# Altium PCB AX301_AX4010.PcbDoc (part 3 of 10)
Units mil, origin at the board's own origin, x right, y up, seen from the top; angles counter-clockwise.
Board outline 5185 x 3614 mil, 4 copper layers (Top Layer, GND, Mid-Layer 1, Bottom Layer); 191 components, 338 nets, 1108 pads, 420 vias.
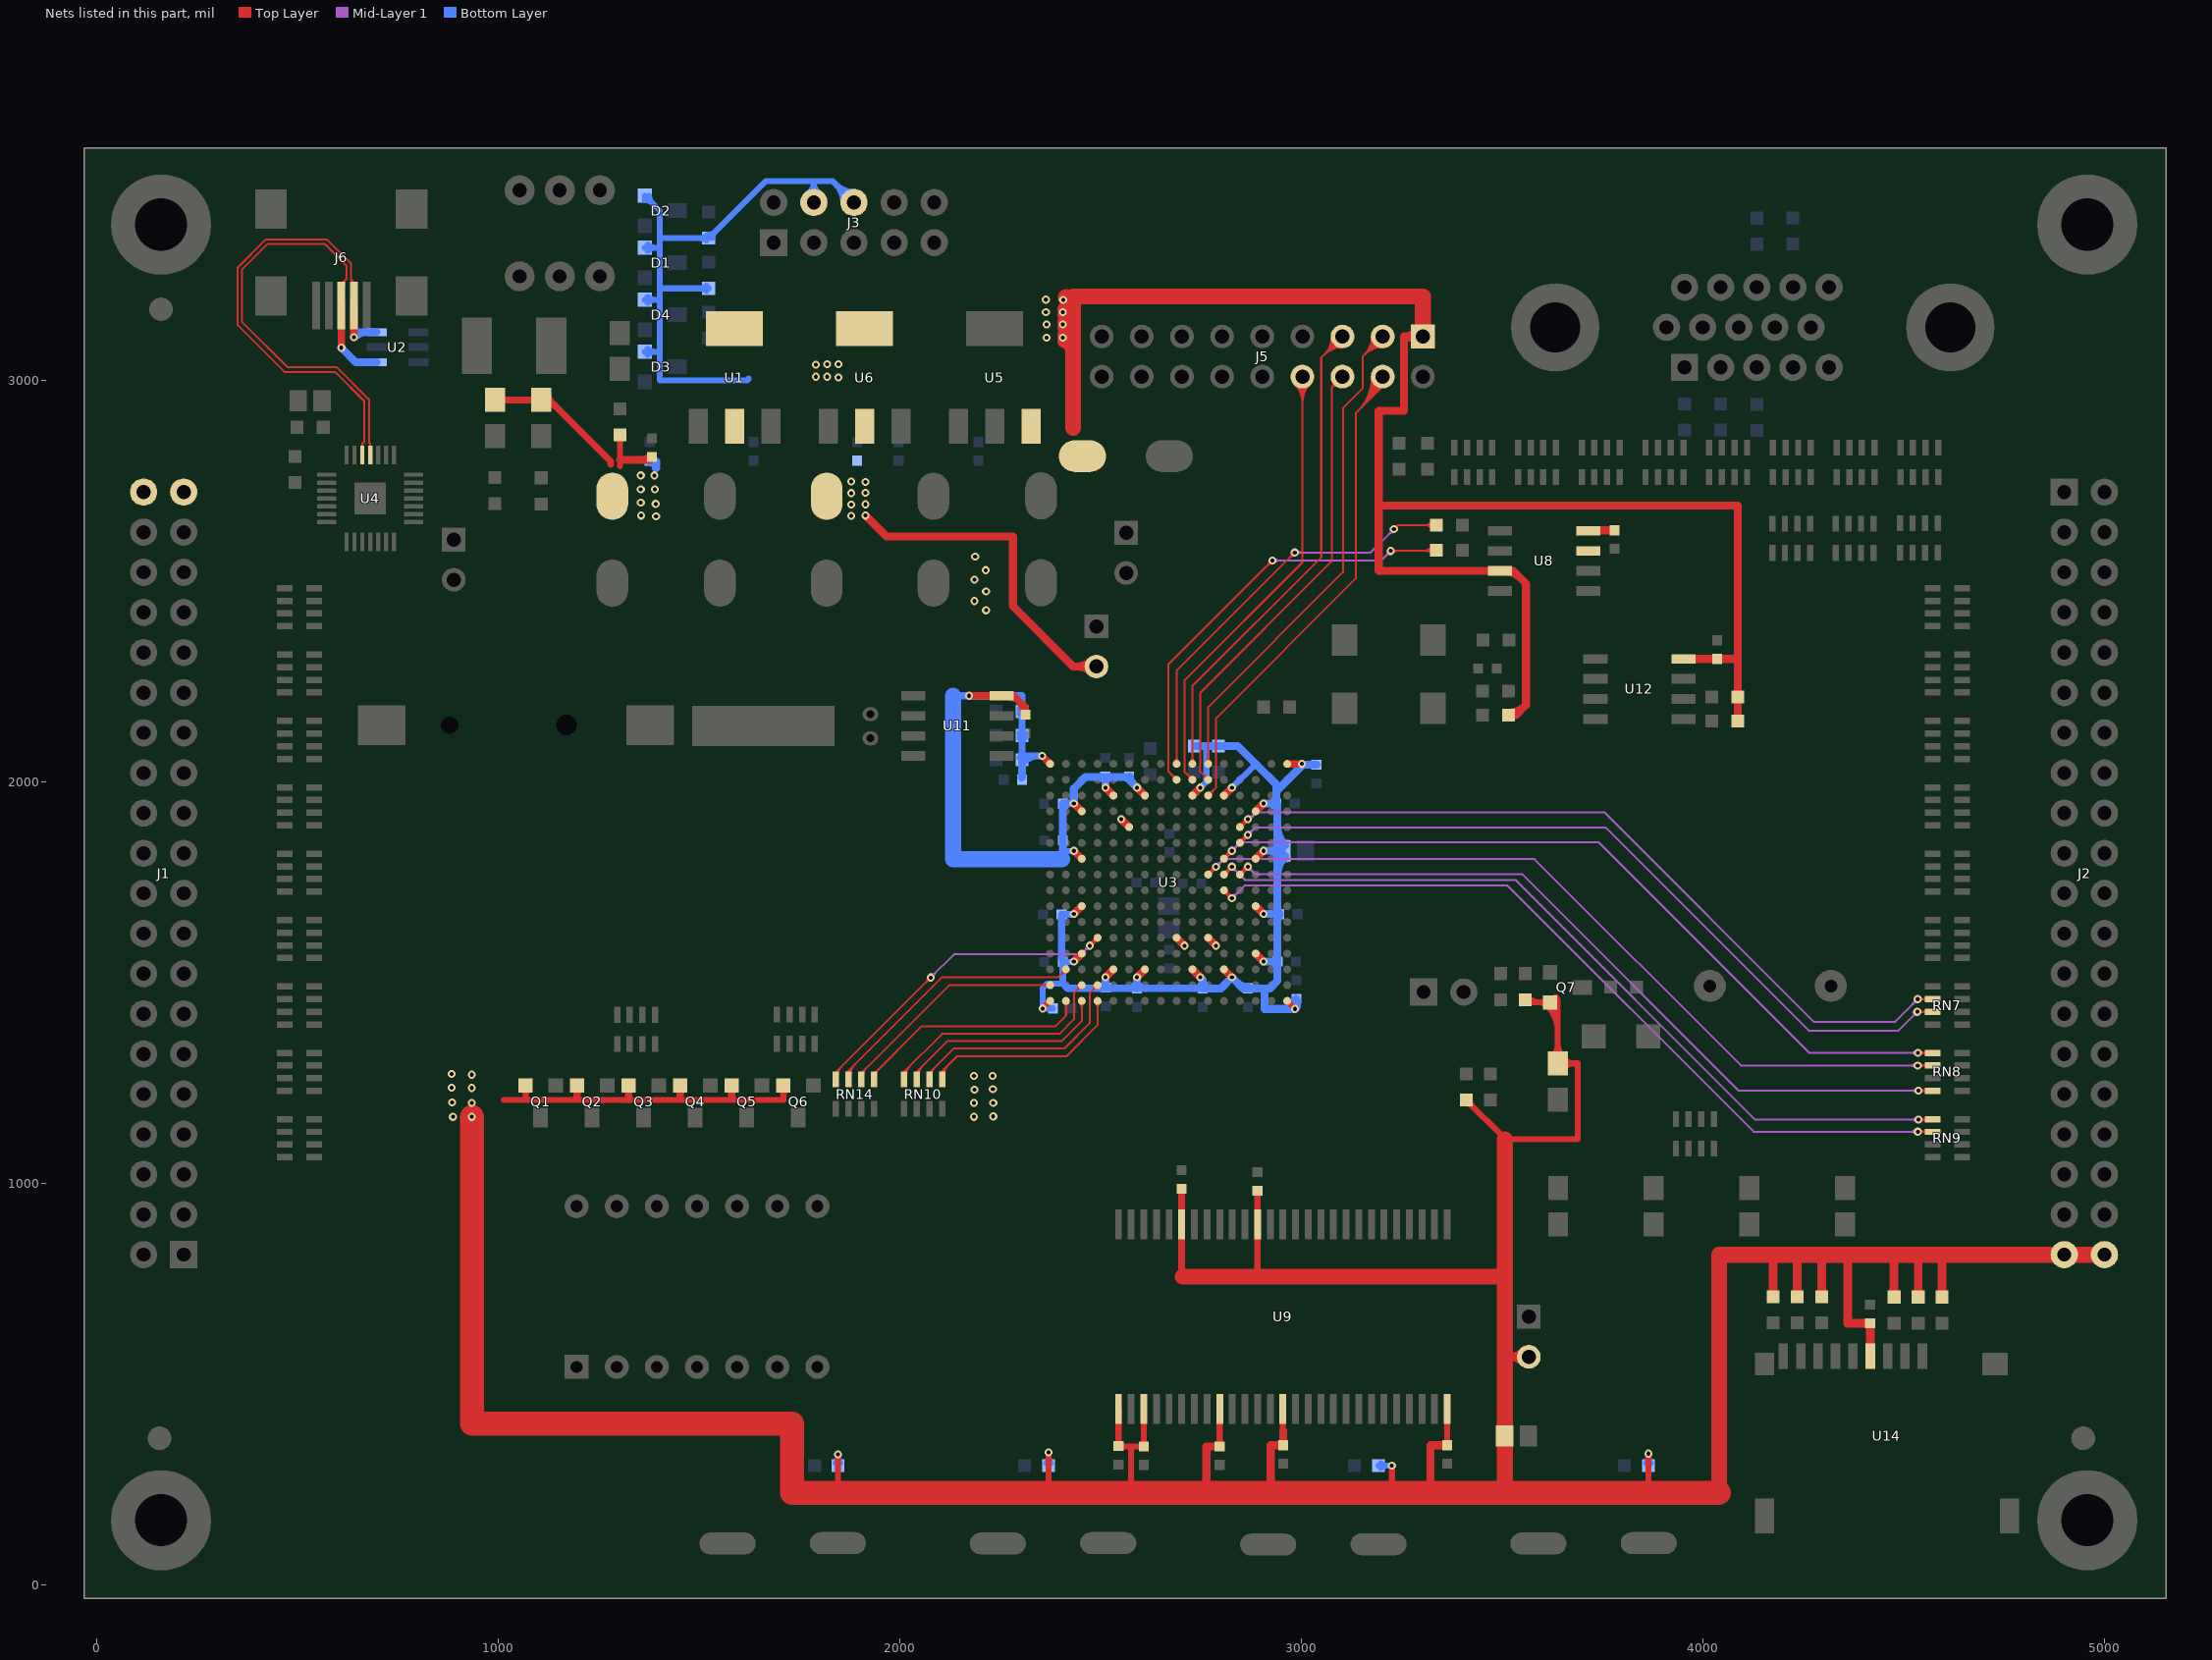
[diagram p5: the nets of this part, all layers, seen from the top]

## Via types
v1: diameter 20, hole 10, Top Layer to Bottom Layer, 377 vias
v2: diameter 30, hole 15, Top Layer to Bottom Layer, 41 vias
v3: diameter 40, hole 20, Top Layer to Bottom Layer, 2 vias

## Nets (pads, with @x,y where several pads share a name; then routed paths per layer and width w, separated by ;. In a path a pad name is that pad's centre, name@x,y a point inside that pad or via, vN(x,y) a via of type N, cw(c..) or ccw(c..) an arc to the next point about the centre after c; other vN are vias at no path point) (continued)
D2V5: C4.1 D1.2 D2.2 D3.2 D4.2 EC1.1 J3.4 J3.6 P3.2 R8.1 R15.1 U3.F12 U3.H12 U3.L5 U6.2 U6.4 | length 2947.9
  Top Layer w19.68: v1(2551.89,1906.48) U3.L5@2571.57,1886.8 ; U3.H12@2689.68,1611.2 v1(2709.37,1591.52) ; U3.F12@2768.43,1611.2 v1(2788.11,1591.52)
  Top Layer w20: v1(1915,2663) 1967,2611 2282,2611 2282,2437 2432,2287 P3.2@2490,2287 ; P3.2@2476.19,2273.19 ccw(c2442.86,2239.86) 2442.86,2287 ccw(c2442.86,2334.14) P3.2@2476.19,2300.81
  Bottom Layer w15: D3.2@1365,3071 1400,3071 ; D4.2@1365,3200.67 1400.67,3200.67 ; D1.2@1365,3330.33 1401.33,3330.33 ; D2.2@1365,3449.5 cw(c1365,3424.15) 1382.92,3442.08 cw(c1400.85,3460) D2.2@1375.5,3460 ; D2.2@1365,3460 1402,3423 1402,3227 ; D3.2@1372.42,3063.58 cw(c1390.35,3045.65) 1390.35,3071 cw(c1390.35,3096.35) D3.2@1372.42,3078.42 ; D4.2@1372.42,3193.24 cw(c1390.35,3175.32) 1390.35,3200.67 cw(c1390.35,3226.02) D4.2@1372.42,3208.09 ; D1.2@1372.42,3322.91 cw(c1390.35,3304.98) 1390.35,3330.33 cw(c1390.35,3355.68) D1.2@1372.42,3337.76 ; 1407,3354 R8.1@1524,3354 1666,3496 1833,3496 J3.6@1886,3443 ; R15.1@1517.99,3222.99 ccw(c1503.48,3208.48) 1503.48,3229 ccw(c1503.48,3249.52) R15.1@1517.99,3235.01 ; R8.1@1517.99,3347.99 ccw(c1503.48,3333.48) 1503.48,3354 ccw(c1503.48,3374.52) R8.1@1517.99,3360.01 ; R15.1@1524,3229 1404,3229 1402,3227 ; R8.1@1524,3362.5 ccw(c1524,3383.02) 1538.51,3368.51 ccw(c1553.02,3354) R8.1@1532.5,3354 ; 1624,3004 1620,3000 1402,3000 1402,3227 ; J3.4@1771.49,3465.18 ccw(c1753.95,3492) 1786,3492 ; J3.4@1786,3443 1786,3492 ; J3.4@1800.51,3465.18 cw(c1818.05,3492) 1786,3492 ; J3.6@1859.5,3443 ccw(c1795.52,3443) 1840.76,3488.24 ccw(c1886,3533.48) J3.6@1886,3469.5
  other v1: 1879,2662 1879,2690 1915,2691 1879,2719 1915,2720 1915,2747 1879,2748 1847,3007 1791,3009 1819,3009 1791,3039 1819,3040 1847,3040
D3V3: C10.1 C11.1 C12.1 C13.1 C14.1 C15.1 C16.1 C17.1 C18.1 C19.1 C20.1 C22.1 C23.1 C24.2 C25.1 C26.1 C27.1 C28.1 C29.1 C30.1 C31.1 C32.1 C33.1 C34.1 C35.1 C36.1 C37.1 C43.1 C44.1 C47.1 C49.1 C50.1 EC5.1 EC6.1 J1.39 J1.40 J2.39 J2.40 J5.1 L1.1 LED5.1 LED7.1 LED8.1 P1.2 Q1.2 Q2.2 Q3.2 Q4.2 Q5.2 Q6.2 Q7.2 R1.1 R9.1 R10.1 R11.1 R23.1 R24.1 R25.1 R26.1 R27.1 R32.1 R35.1 R36.1 R37.1 R38.1 R41.1 R42.1 R43.1 R45.1 R47.1 R52.1 U1.2 U1.4 U3.A1 U3.A16 U3.C4 U3.C7 U3.C10 U3.C13 U3.E3 U3.E14 U3.G3 U3.G14 U3.K3 U3.K14 U3.M3 U3.M14 U3.P4 U3.P7 U3.P10 U3.P13 U3.T1 U3.T16 U5.3 U8.3 U8.7 U8.8 U9.1 U9.3 U9.9 U9.14 U9.27 U9.43 U9.49 U11.8 U12.8 U14.4 | length 23612.4
  Top Layer w15: 1013,1207 1068,1207 ; Q1.2@1060.58,1235.58 cw(c1042.65,1217.65) 1068,1217.65 cw(c1093.35,1217.65) Q1.2@1075.42,1235.58 ; Q1.2@1068,1243 1068,1207 ; R1.1@1296.99,2857.99 cw(c1282.48,2843.48) 1303,2843.48 cw(c1323.52,2843.48) R1.1@1309.01,2857.99 ; 1303,2786 1303,2802 R1.1@1303,2864 ; Q6.2@1702.58,1235.58 cw(c1684.65,1217.65) 1710,1217.65 cw(c1735.35,1217.65) Q6.2@1717.42,1235.58 ; Q6.2@1710,1243 1710,1207 1068,1207 ; 1846,228 v1(1846,324) ; v1(2356,1435) U3.T16@2374.72,1453.72 ; 2371,228 v1(2371,329) ; U9.1@2545,437 C30.1@2545,345 2545,344.01 2576.5,344.01 ; C30.1@2548.54,348.54 ccw(c2559.47,359.47) 2559.47,344.01 ; 2576.5,228 2576.5,344.01 ; U9.3@2607.99,437 C29.1@2607.99,344.01 2576.5,344.01 ; C31.1@2797,344 U9.9@2796.97,437 ; 2891,768 C35.1@2891,981 ; 2954.45,378 U9.14@2954.45,437 ; U3.A16@2965.28,1453.72 v1(2985,1434) ; 3226,229 v1(3226,296) ; C33.1@3363.9,347.1 U9.27@3363.9,437 ; R11.1@3411,1198.5 cw(c3411,1177.98) 3425.51,1192.49 cw(c3440.02,1207) R11.1@3419.5,1207 ; R11.1@3411,1207 3507,1111 3507,1109 3689,1109 3689,1298 LED5.1@3639,1298 3639,1450 ; R32.1@3558,1457 3558,1450 Q7.2@3620,1450 3639,1450 ; R32.1@3564.01,1463.01 ccw(c3595.42,1494.42) 3595.42,1450 ; Q7.2@3612.58,1457.42 cw(c3594.65,1475.35) 3594.65,1450 cw(c3594.65,1424.65) 3612.58,1442.58 cw(c3548.78,1378.78) 3639,1378.78 ; Q7.2@3623.18,1453.18 cw(c3584.99,1414.99) 3639,1414.99 ; LED5.1@3626.63,1315.37 ccw(c3596.75,1345.25) 3639,1345.25 ccw(c3681.25,1345.25) LED5.1@3651.37,1315.37 ; Q7.2@3628.89,1444.41 cw(c3639,1438.06) 3639,1450 ; Q7.2@3628.89,1455.59 ccw(c3639,1461.94) 3639,1450 ; Q7.2@3633.79,1463.79 cw(c3621.21,1451.21) 3639,1451.21 ; LED5.1@3651.37,1285.63 cw(c3681.25,1255.75) 3681.25,1298 cw(c3681.25,1340.25) LED5.1@3651.37,1310.37 ; 3865,231 v1(3865,326)
  Top Layer w17: 2702.48,767 U9.49@2702.48,897 C34.1@2702.48,985.52
  Top Layer w17.72: LED7.1@992,2951 LED8.1@1107,2951 1127,2951 1280,2798 1280,2791 ; LED8.1@1107,2949.86 cw(c1107,2898.82) 1143.09,2934.91 ; LED8.1@1123.14,2966 ccw(c1150.04,2966) LED8.1@1131.02,2946.98 ; Q2.2@1189.94,1236.54 cw(c1174.33,1220.93) 1196.4,1220.93 cw(c1218.47,1220.93) Q2.2@1202.86,1236.54 ; 1196.4,1208.4 Q2.2@1196.4,1243 ; Q3.2@1318.34,1236.54 cw(c1302.73,1220.93) 1324.8,1220.93 cw(c1346.87,1220.93) Q3.2@1331.26,1236.54 ; 1324.8,1207.2 Q3.2@1324.8,1243 ; Q4.2@1446.74,1236.54 cw(c1431.13,1220.93) 1453.2,1220.93 cw(c1475.27,1220.93) Q4.2@1459.66,1236.54 ; 1453.2,1211.8 Q4.2@1453.2,1243 ; Q5.2@1575.14,1236.54 cw(c1559.53,1220.93) 1581.6,1220.93 cw(c1603.67,1220.93) Q5.2@1588.06,1236.54 ; 1581.6,1214.4 Q5.2@1581.6,1243 ; v1(2173,2214) U11.8@2254,2214 2284,2214 2313,2185 C36.1@2313,2167 ; U11.8@2272,2210.86 cw(c2272,2174.3) 2297.85,2200.15 ; 2294.06,2203.94 cw(c2257.11,2167) C36.1@2309.36,2167 ; v1(2355,2064) U3.T1@2374.72,2044.28 ; U3.A1@2965.28,2044.28 v1(3001.72,2044.28)
  Top Layer w19.68: v1(2433.78,1552.15) U3.P13@2453.46,1571.83 ; v1(2433.78,1670.26) U3.P10@2453.46,1689.94 ; v1(2433.78,1827.74) U3.P7@2453.46,1808.06 ; v1(2433.78,1945.85) U3.P4@2453.46,1926.17 ; v1(2512.52,1512.78) U3.M14@2532.2,1532.46 ; v1(2512.52,1985.22) U3.M3@2532.2,1965.54 ; v1(2591.26,1512.78) U3.K14@2610.94,1532.46 ; v1(2591.26,1985.22) U3.K3@2610.94,1965.54 ; U3.G14@2729.06,1532.46 v1(2748.74,1512.78) ; U3.G3@2729.06,1965.54 v1(2748.74,1985.22) ; U3.E14@2807.8,1532.46 v1(2827.48,1512.78) ; U3.E3@2807.8,1965.54 v1(2827.48,1985.22) ; U3.C13@2886.54,1571.83 v1(2906.22,1552.15) ; U3.C10@2886.54,1689.94 v1(2906.22,1670.26) ; U3.C7@2886.54,1808.06 v1(2906.22,1827.74) ; U3.C4@2886.54,1926.17 v1(2906.22,1945.85)
  Top Layer w20: 1303,2802 C44.1@1379,2802 ; 1360.07,2802 ccw(c1360.07,2831.93) C44.1@1381.23,2810.77 ; 2764,230 2764,344 C31.1@2797,344 ; 2924,228 2924,347 C32.1@2955,347 2955,383.3 ; J5.1@3289.16,3095.4 ccw(c3256,3062.38) 3256,3109.17 ; J5.1@3289.16,3122.95 cw(c3256,3155.96) 3256,3109.17 ; J5.1@3303,3109.17 3256,3109.17 ; 3322,228 3322,347 C33.1@3364,347 ; 3507,567 P1.2@3567,567 ; U8.3@3513,2523 cw(c3513,2481.96) 3542.02,2510.98 ; L1.1@3517,2166 3535,2166 3560,2191 3560,2493 3528,2525 U8.3@3495,2525 3193,2525 3193,2688 ; L1.1@3517,2172 ccw(c3517,2229.94) 3557.97,2188.97 ; P1.2@3553.19,553.19 ccw(c3519.86,519.86) 3519.86,567 ccw(c3519.86,614.14) P1.2@3553.19,580.81 ; U8.8@3715,2626.24 C24.2@3781,2626.24 ; U12.8@3953,2306 C37.1@4036,2306 4088,2306 ; R24.1@4088,2151 R23.1@4088,2211 4088,2306 ; R42.1@4537,716 4537,821.65 ; 3193,2688 4088,2688 4088,2306 ; 3193,2688 3193,2924 3256,2924 3256,3109.17
  Top Layer w22: R52.1@4176,717 4176,821.65 ; R45.1@4236,717 4236,821.65 ; R41.1@4297,717 4297,821.65 ; 4361,821.65 4361,651 C43.1@4417,651 4417.66,651 U14.4@4417.66,568.82 ; R43.1@4477,716 4477,821.65 ; R47.1@4596,716 4596,821.65
  Top Layer w40: 2413.07,3098.93 ccw(c2367.37,3144.63) 2432,3144.63 ; 2413.07,3113.07 cw(c2367.37,3067.37) 2432,3067.37 ; 2413.07,3131.93 ccw(c2367.37,3177.63) 2432,3177.63 ; 2413.07,3146.07 cw(c2367.37,3100.37) 2432,3100.37 ; 2413.07,3162.93 ccw(c2367.37,3208.63) 2432,3208.63 ; 2413.07,3177.07 cw(c2367.37,3131.37) 2432,3131.37 ; 2414.07,3207.07 cw(c2370.79,3163.79) 2432,3163.79 ; 2432,2882 2432,3209 3303,3209 J5.1@3303,3109.17 ; 2705,767 3502,767 3507,762 ; 2764,228 2764,230 ; 3507,228 3507,567 3507,762 ; 3507,1109 3507,762 ; 4041,228 4041,821.65 4176,821.65 4236,821.65 4297,821.65 4361,821.65 4477,821.65 4537,821.65 4596,821.65 J2.39@4901,821.65 J2.40@5001,821.65
  Top Layer w60: v1(934,1165) 934,401 1732,401 1732,228 1846,228 2371,228 2576.5,228 2764,228 2924,228 3322,228 3507,228 4041,228
  Bottom Layer w15: R38.1@1839.99,302.01 ccw(c1825.48,316.52) 1846,316.52 ccw(c1866.52,316.52) R38.1@1852.01,302.01 ; v1@1843.83,322.75 cw(c1832.88,316.43) 1845.1,313.15 ; R38.1@1846,296 v1(1846,324) ; 1846.9,313.15 cw(c1859.12,316.43) v1@1848.17,322.75 ; R37.1@2364.99,302.01 ccw(c2350.48,316.52) 2371,316.52 ccw(c2391.52,316.52) R37.1@2377.01,302.01 ; R37.1@2371,296 v1(2371,329) ; C22.1@2382,1435 v1(2356,1435) 2356,1485 2368,1497 2406,1497 ; C23.1@2406,1551 v1@2432.63,1551 ; 2408,1827 v1@2433.04,1827 ; v1(2748.74,1985.22) 2764,2000.48 2764,2088 2765,2089 ; v1(2827.48,1985.22) 2883.26,2041 2890,2041 ; R36.1@3193,296 v1(3226,296) ; R36.1@3199.01,289.99 cw(c3213.52,275.48) 3213.52,296 cw(c3213.52,316.52) R36.1@3199.01,302.01 ; R35.1@3858.99,302.01 ccw(c3844.48,316.52) 3865,316.52 ccw(c3885.52,316.52) R35.1@3871.01,302.01 ; v1@3862.83,324.75 cw(c3850.35,317.54) 3864.27,313.81 ; R35.1@3865,296 v1(3865,326) ; 3865.73,313.81 cw(c3879.65,317.54) v1@3867.17,324.75
  Bottom Layer w17.72: 2133,2214 v1(2173,2214) 2305,2214 R27.1@2305,2175 R25.1@2305,2115 R26.1@2305,2064 ; R26.1@2299.95,2060.05 ccw(c2287.76,2072.24) 2305,2072.24 ccw(c2322.24,2072.24) R26.1@2310.05,2060.05 ; R25.1@2299.95,2109.95 cw(c2287.76,2097.76) 2305,2097.76 cw(c2322.24,2097.76) R25.1@2310.05,2109.95 ; R25.1@2299.95,2120.05 ccw(c2287.76,2132.24) 2305,2132.24 ccw(c2322.24,2132.24) R25.1@2310.05,2120.05 ; R27.1@2299.95,2169.95 cw(c2287.76,2157.76) 2305,2157.76 cw(c2322.24,2157.76) R27.1@2310.05,2169.95 ; R27.1@2299.95,2180.05 ccw(c2287.76,2192.24) 2305,2192.24 ccw(c2322.24,2192.24) R27.1@2310.05,2180.05 ; R26.1@2305,2055 R26.1@2305,2064 ; R26.1@2310.05,2049.95 cw(c2343.97,2016.03) 2343.97,2064 ; v1(2355,2064) R26.1@2305,2064 ; 2403,1567.03 ccw(c2422.03,1567.03) C23.1@2408.58,1553.58 ; v1(2433.78,1670.26) 2432.52,1669 C17.1@2403,1669 2403,1562.03 2406,1559.03 C23.1@2406,1551 2406,1497 2417.74,1485.26 C18.1@2591.26,1485.26 ; 2500,1485.26 ccw(c2500,1500) C47.1@2510.42,1489.58 ; C47.1@2515.58,1489.58 ccw(c2526,1500) 2526,1485.26 ; C18.1@2591,1485 C28.1@2755,1485
  Bottom Layer w19.68: C10.1@2304,2011 2305,2011 R26.1@2305,2055 ; 2486,2011.48 C13.1@2512.52,2011.48 ; C47.1@2512.52,1487.48 v1(2512.52,1512.78) ; v1(2512.52,1985.22) C13.1@2512.52,2011.48 ; C12.1@2563.48,2011.48 C13.1@2512.52,2011.48 ; C12.1@2571,2012 2571,2005.48 v1(2591.26,1985.22) ; C12.1@2573.66,2013 ccw(c2598.23,2013) 2580.85,1995.63 ; C18.1@2591.26,1485.26 v1(2591.26,1512.78) ; R10.1@2737,2089 2765,2089 R9.1@2794,2089 2842,2089 2890,2041 2938,1993 2938,1976 ; v1@2748.63,1512.67 cw(c2733.25,1497.29) C28.1@2755,1497.29 ; C28.1@2752.66,1486.26 ccw(c2732.84,1496.88) v1(2748.74,1512.78) 2755,1506.52 C28.1@2755,1485 2799.7,1485 v1(2827.48,1512.78) 2855.26,1485 C27.1@2867,1485 2909,1485 ; 2842.42,1497.84 ccw(c2867,1522.42) C27.1@2867,1487.66 ; v1(2906.22,1552.15) C25.1@2940.85,1552.15 ; v1(2906.22,1670.26) C20.1@2941,1670.26 ; v1(2906.22,1827.74) C19.1@2941,1827.74 ; v1(2906.22,1945.85) C16.1@2937.85,1945.85 ; 2909,1466 2909,1485 ; C16.1@2936.12,1944.12 cw(c2924.34,1932.34) 2941,1932.34 ; C16.1@2938,1946 2938,1976 ; 2941,1653.6 cw(c2961.07,1653.6) C20.1@2946.88,1667.79 ; 2941,1685.74 ccw(c2961.07,1685.74) C20.1@2946.88,1671.55 ; 2941,1767.55 cw(c3007.07,1767.55) C19.1@2960.35,1814.27 ; 2941,1887.93 ccw(c3007.07,1887.93) C19.1@2960.35,1841.21 ; C16.1@2941,1943 C19.1@2941,1827.74 ; C19.1@2943.65,1819.39 ccw(c2923.49,1799.23) 2923.49,1827.74 ccw(c2923.49,1856.26) C19.1@2943.65,1836.09 ; C19.1@2952,1827.74 C19.1@2941,1827.74 ; C11.1@2985.97,1457.28 cw(c2972.83,1446.17) v1(2985,1434) 2988,1437 C11.1@2988,1459 ; C15.1@3038,2042 3004,2042 2938,1976 ; 2909,1485 2922,1485 2941,1504 C25.1@2941,1552 C20.1@2941,1670.26 ; C20.1@2941,1670.26 C19.1@2941,1827.74
  Bottom Layer w20: C49.1@1376.88,2797.5 cw(c1376.06,2780.58) 1393,2780.58 ; 1393,2789 1393,2798 ; 2404.15,1807 2406,1807 C26.1@2406,1854 C14.1@2406,1945 2406,1945.85 2421,1945.85 ; v1(2433.78,1945.85) 2433.78,1982.78 2462.48,2011.48 2486,2011.48 ; 2909,1466 2909,1434 v1(2985,1434)
  Bottom Layer w40: 2133,2214 2133,1807 2404.15,1807
  other v1: 887,1165 2185,1165 2233,1166 934,1200 2185,1200 2233,1200 885,1201 2186,1233 2232,1234 934,1237 884,1238 2185,1267 2231,1267 934,1270 884,1272 2215,2427 2186,2450 2215,2474 2186,2503 2214,2527 2188,2561 1393,2661 1356,2663 1392,2692 1355,2695 1355,2728 1390,2728 1355,2763 1389,2763 2366,3106 2406,3106 2366,3139 2406,3139 2364,3170 2406,3170 2407,3200 2364,3201
D5: RN7.2 U3.D5 | length 2135.7
  Top Layer w5: v1(4535.75,1458.25) RN7.2@4573,1458.25 ; v1@4541.05,1452.95 cw(c4553.85,1440.15) 4553.85,1458.25 cw(c4553.85,1476.36) v1@4541.05,1463.56 ; RN7.2@4557.39,1454.45 ccw(c4548.22,1445.28) 4548.22,1458.25 ccw(c4548.22,1471.23) RN7.2@4557.39,1462.05
  Top Layer w10: U3.D5@2847.17,1886.8 v1(2866.85,1906.48) ; U3.D5@2847.17,1891.64 ccw(c2847.17,1903.33) 2855.43,1895.06 ccw(c2863.7,1886.8) U3.D5@2852.01,1886.8 ; v1@2861.85,1906.48 cw(c2849.78,1906.48) 2858.32,1897.95 cw(c2866.85,1889.41) v1@2866.85,1901.48
  Mid-Layer 1 w5: v1(2866.85,1906.48) 2872.48,1906.48 2890,1924 3755,1924 4277,1402 4479.49,1402 v1(4535.75,1458.25) ; v1@2866.85,1908.98 ccw(c2866.85,1928.61) 2880.73,1914.73 ; v1@2866.85,1913.98 ccw(c2866.85,1945.68) 2889.27,1923.27 ; v1@4528.25,1458.25 cw(c4510.14,1458.25) 4522.94,1445.45 cw(c4535.75,1432.65) v1@4535.75,1450.75
D6: RN7.3 U3.D6 | length 2113.8
  Top Layer w5: v1(4534.76,1426.76) RN7.3@4573,1426.76 ; v1@4540.06,1421.45 cw(c4552.86,1408.65) 4552.86,1426.76 cw(c4552.86,1444.86) v1@4540.06,1432.06 ; RN7.3@4557.39,1422.96 ccw(c4548.22,1413.78) 4548.22,1426.76 ccw(c4548.22,1439.73) RN7.3@4557.39,1430.56
  Top Layer w10: U3.D6@2847.17,1847.43 v1(2866.85,1867.11) ; U3.D6@2847.17,1852.27 ccw(c2847.17,1863.96) 2855.43,1855.69 ccw(c2863.7,1847.43) U3.D6@2852.01,1847.43 ; v1@2861.85,1867.11 cw(c2849.78,1867.11) 2858.32,1858.58 cw(c2866.85,1850.04) v1@2866.85,1862.11
  Mid-Layer 1 w5: v1(2866.85,1867.11) 2885.74,1886 3758,1886 4264,1380 4488,1380 v1(4534.76,1426.76) ; v1@2866.85,1874.61 ccw(c2866.85,1892.72) 2879.65,1879.91 ccw(c2892.46,1867.11) v1@2874.35,1867.11 ; v1@4527.26,1426.76 cw(c4509.15,1426.76) 4521.95,1413.95 cw(c4534.76,1401.15) v1@4534.76,1419.26
D8: RN8.4 U3.D8 | length 2122.1
  Top Layer w5: v1(4538,1230) RN8.4@4572.89,1230 ; v1@4543.3,1224.7 cw(c4556.11,1211.89) 4556.11,1230 cw(c4556.11,1248.11) v1@4543.3,1235.3 ; v1@4544.5,1233.75 ccw(c4552.57,1238.41) 4550.16,1229.41 ; v1@4544.78,1226.8 cw(c4549.09,1224.77) 4550.32,1229.36 ; v1@4547.94,1230 cw(c4547.94,1216.64) RN8.4@4557.39,1226.09 ; 4548.49,1230 ccw(c4548.49,1242.59) RN8.4@4557.39,1233.69
  Top Layer w10: U3.D8@2847.17,1768.68 v1(2866.85,1788.37) ; U3.D8@2847.17,1773.53 ccw(c2847.17,1785.22) 2855.43,1776.95 ccw(c2863.7,1768.68) U3.D8@2852.01,1768.68 ; v1@2861.85,1788.37 cw(c2849.78,1788.37) 2858.32,1779.84 cw(c2866.85,1771.3) v1@2866.85,1783.37
  Mid-Layer 1 w5: v1@2866.85,1780.87 cw(c2866.85,1762.76) 2879.65,1775.57 cw(c2892.46,1788.37) v1@2874.35,1788.37 ; v1(2866.85,1788.37) 2885.22,1770 3550,1770 4090,1230 v1(4538,1230) ; v1@4532.7,1224.7 ccw(c4519.89,1211.89) 4519.89,1230 ccw(c4519.89,1248.11) v1@4532.7,1235.3
DATA0: R5.1 U3.H2 | length 1293.2
  Top Layer w5: U3.H2@2682.34,2004.91 ccw(c2664.62,2004.91) 2677.15,2017.44 ccw(c2689.68,2029.97) U3.H2@2689.68,2012.25 ; U3.H2@2689.68,2004.91 2669,2025.59 2669,2292 v1(2928,2551) ; v1@2920.5,2551 cw(c2902.39,2551) 2915.2,2538.2 cw(c2928,2525.39) v1@2928,2543.5 ; v1(3223,2575) R5.1@3335,2575 ; v1@3228.3,2569.7 cw(c3241.11,2556.89) 3241.11,2575 cw(c3241.11,2593.11) v1@3228.3,2580.3 ; 3299.58,2575 ccw(c3299.58,2614.42) R5.1@3327.45,2586.55 ; 3309.24,2575 cw(c3309.24,2549.24) R5.1@3327.45,2567.45 ; 3311.65,2575 ccw(c3311.65,2602.35) R5.1@3330.99,2583.01
  Mid-Layer 1 w5: v1(2928,2551) 3199,2551 v1(3223,2575) ; v1@2933.3,2545.7 cw(c2946.11,2532.89) 2946.11,2551 cw(c2946.11,2569.11) v1@2933.3,2556.3 ; v1@3215.5,2575 cw(c3197.39,2575) 3210.2,2562.2 cw(c3223,2549.39) v1@3223,2567.5
DCLK: R14.1 U3.H1 | length 1245.1
  Top Layer w5: U3.H1@2684.49,2049.47 ccw(c2671.96,2062) 2689.68,2062 ccw(c2707.41,2062) U3.H1@2694.88,2049.47 ; U3.H1@2689.68,2044.28 2689.68,2276.68 v1(2984,2571) ; v1@2976.5,2571 cw(c2958.39,2571) 2971.2,2558.2 cw(c2984,2545.39) v1@2984,2563.5 ; v1(3231,2629) 3241,2639 ; v1@3232.42,2636.37 ccw(c3234.22,2645.78) 3241,2639 ; v1@3238.37,2630.42 cw(c3247.77,2632.22) 3241,2639 ; R14.1@3327.45,2629.45 ccw(c3304.41,2606.41) 3304.41,2639 ccw(c3304.41,2671.59) R14.1@3327.45,2648.55 ; R14.1@3330.99,2632.99 ccw(c3316.48,2618.48) 3316.48,2639 ccw(c3316.48,2659.52) R14.1@3330.99,2645.01 ; R14.1@3337,2639 3241,2639
  Mid-Layer 1 w5: v1(2984,2571) 3173,2571 v1(3231,2629) ; v1@2989.3,2565.7 cw(c3002.11,2552.89) 3002.11,2571 cw(c3002.11,2589.11) v1@2989.3,2576.3 ; v1@3223.5,2629 cw(c3205.39,2629) 3218.2,2616.2 cw(c3231,2603.39) v1@3231,2621.5
DIG0: RN14.7 U3.R14 | length 763.8
  Top Layer w5: RN14.7@1867.87,1269.96 cw(c1879.72,1269.96) 1871.34,1278.34 ; RN14.7@1869.71,1274.56 ccw(c1866.72,1279.5) 1872.5,1279.5 ; RN14.7@1872.5,1258.15 1872.5,1279.5 ; RN14.7@1872.87,1269.96 cw(c1896.79,1269.96) 1879.88,1286.88 ; RN14.7@1875.28,1274.56 cw(c1878.27,1279.5) 1872.5,1279.5 ; RN14.7@1877.87,1269.96 cw(c1913.86,1269.96) 1888.41,1295.41 ; U3.R14@2406.75,1532.46 cw(c2389.03,1532.46) 2401.56,1519.93 cw(c2414.09,1507.4) U3.R14@2414.09,1525.12 ; U3.R14@2414.09,1532.46 2394.63,1513 2106,1513 1872.5,1279.5
DIG1: RN10.5 U3.N16 | length 595.6
  Top Layer w5: RN10.5@2103.17,1274.81 ccw(c2101.41,1278.49) 2105.49,1278.49 ; RN10.5@2105.49,1258.15 2105.49,1278.49 ; RN10.5@2105.86,1269.96 cw(c2127.35,1269.96) 2112.16,1285.16 ; RN10.5@2107.81,1274.81 cw(c2109.57,1278.49) 2105.49,1278.49 ; RN10.5@2110.86,1269.96 cw(c2144.42,1269.96) 2120.69,1293.69 ; U3.N16@2487.64,1448.53 cw(c2475.11,1436) 2492.83,1436 cw(c2510.56,1436) U3.N16@2498.03,1448.53 ; U3.N16@2492.83,1453.72 2492.83,1393.83 2415,1316 2143,1316 2105.49,1278.49
DIG2: RN10.7 U3.P16 | length 600.1
  Top Layer w5: RN10.7@2042.5,1258.15 2042.5,1277.5 2119,1354 2404,1354 2453.46,1403.46 U3.P16@2453.46,1453.72 ; RN10.7@2042.87,1269.96 cw(c2061.96,1269.96) 2048.46,1283.46 ; RN10.7@2047.87,1269.96 cw(c2079.04,1269.96) 2057,1292 ; U3.P16@2448.27,1448.53 cw(c2435.74,1436) 2453.46,1436 cw(c2471.19,1436) U3.P16@2458.66,1448.53
DIG3: RN14.6 U3.T15 | length 631.4
  Top Layer w5: RN14.6@1903.99,1258.15 1903.99,1273.99 2123.09,1493.09 U3.T15@2374.72,1493.09 ; RN14.6@1904.37,1269.96 cw(c1915,1269.96) RN14.6@1907.48,1277.48 ; RN14.6@1909.37,1269.96 cw(c1932.07,1269.96) 1916.02,1286.02 ; U3.T15@2369.53,1487.9 ccw(c2357,1475.37) 2357,1493.09 ccw(c2357,1510.82) U3.T15@2369.53,1498.29
DIG4: RN10.8 U3.P15 | length 654.7
  Top Layer w5: RN10.8@2011,1258.15 2011,1277 2106,1372 2398,1372 2433.78,1407.78 2433.78,1473.41 U3.P15@2453.46,1493.09 ; RN10.8@2011.37,1269.96 cw(c2029.27,1269.96) 2016.62,1282.62 ; RN10.8@2016.37,1269.96 cw(c2046.34,1269.96) 2025.15,1291.15 ; U3.P15@2446.12,1493.09 cw(c2428.4,1493.09) 2440.93,1480.56 cw(c2453.46,1468.03) U3.P15@2453.46,1485.75
DIG5: RN14.8 U3.N12 | length 965
  Top Layer w5: RN14.8@1841,1258.15 1841,1276 v1(2077,1512) ; RN14.8@1841.37,1269.96 cw(c1856.86,1269.96) 1845.91,1280.91 ; RN14.8@1846.37,1269.96 cw(c1873.93,1269.96) 1854.44,1289.44 ; v1@2069.5,1512 cw(c2051.39,1512) 2064.2,1499.2 cw(c2077,1486.39) v1@2077,1504.5
  Top Layer w10: v1(2473.15,1591.52) U3.N12@2492.83,1611.2 ; v1@2473.15,1596.52 ccw(c2473.15,1608.59) 2481.68,1600.05 ccw(c2490.22,1591.52) v1@2478.15,1591.52 ; U3.N12@2487.99,1611.2 cw(c2476.3,1611.2) 2484.57,1602.94 cw(c2492.83,1594.67) U3.N12@2492.83,1606.36
  Mid-Layer 1 w5: v1(2077,1512) 2135,1570 2451.63,1570 v1(2473.15,1591.52) ; v1@2077,1519.5 ccw(c2077,1537.61) 2089.8,1524.8 ccw(c2102.61,1512) v1@2084.5,1512 ; v1@2465.65,1591.52 cw(c2447.54,1591.52) 2460.35,1578.72 cw(c2473.15,1565.91) v1@2473.15,1584.02
DIG6: RN10.6 U3.N15 | length 627.9
  Top Layer w5: RN10.6@2073.99,1258.15 2073.99,1274.99 2135,1336 2411,1336 2473.15,1398.15 2473.15,1473.41 U3.N15@2492.83,1493.09 ; RN10.6@2074.37,1269.96 cw(c2087.42,1269.96) 2078.19,1279.19 ; RN10.6@2079.37,1269.96 cw(c2104.49,1269.96) 2086.72,1287.72 ; U3.N15@2485.49,1493.09 cw(c2467.77,1493.09) 2480.3,1480.56 cw(c2492.83,1468.03) U3.N15@2492.83,1485.75
DIG7: RN14.5 U3.R16 | length 637.1
  Top Layer w5: RN14.5@1935.49,1258.15 1935.49,1271.49 2055,1391 2388,1391 2414.09,1417.09 U3.R16@2414.09,1453.72 ; RN14.5@1935.49,1275.34 ccw(c1935.49,1284.62) 1942.06,1278.06 ; RN14.5@1940.86,1269.96 cw(c1957.52,1269.96) 1945.74,1281.74 ; U3.R16@2408.9,1448.53 cw(c2396.37,1436) 2414.09,1436 cw(c2431.82,1436) U3.R16@2419.29,1448.53
DM: J6.2 U2.3 U4.5 | length 1328.1
  Top Layer w5: J6.2@634.29,3239.43 ccw(c626.41,3244.41) 633,3251 ; 637.42,3246.58 cw(c631.83,3240.99) J6.2@638.52,3236.76 ; J6.2@640.5,3186.3 640.5,3243.5 633,3251 ; U4.5@659.27,2834.3 ccw(c654.46,2839.1) 661.26,2839.1 ccw(c668.06,2839.1) U4.5@663.25,2834.3 ; U4.5@661.26,2814 661.26,2842.26 666,2847 666,2948.44 593.44,3021 467,3021 351,3137 351,3281 421,3351 573,3351 633,3291 633,3251
  Top Layer w19: v1(640.5,3107) J6.2@640.5,3186.3
  Bottom Layer w19: v1(640.5,3107) 653.5,3120 U2.3@697,3120 ; v1@640.85,3106.65 cw(c673.09,3074.41) U2.3@673.09,3120
DP: J6.3 U2.1 U4.4 | length 1329.8
  Top Layer w5: J6.3@609,3186.3 609,3241 622,3254 ; J6.3@611.32,3235.86 cw(c624.19,3237.78) 614.99,3246.99 ; J6.3@616.26,3236.6 cw(c636.39,3239.61) 622,3254 ; U4.4@678.95,2834.3 ccw(c674.15,2839.1) 680.94,2839.1 ccw(c687.74,2839.1) U4.4@682.94,2834.3 ; U4.4@680.94,2814 680.94,2842.06 677.97,2845.03 677.97,2952.03 597,3033 474,3033 362,3145 362,3276.44 425.56,3340 567,3340 622,3285 622,3254
  Top Layer w19: v1(609,3081) J6.3@609,3186.3
  Bottom Layer w19: v1(609,3081) 645,3045 U2.1@697,3045
E7: RN8.1 U3.E7 | length 2142.5
  Top Layer w5: v1(4536.38,1324.38) RN8.1@4573,1324.38 ; v1@4541.68,1319.07 cw(c4554.48,1306.27) 4554.48,1324.38 cw(c4554.48,1342.48) v1@4541.68,1329.68 ; RN8.1@4557.39,1320.58 ccw(c4548.22,1311.4) 4548.22,1324.38 ccw(c4548.22,1337.35) RN8.1@4557.39,1328.17
  Top Layer w10: U3.E7@2807.8,1808.06 v1(2827.48,1827.74) ; U3.E7@2807.8,1812.9 ccw(c2807.8,1824.59) 2816.06,1816.32 ccw(c2824.33,1808.06) U3.E7@2812.64,1808.06 ; v1@2822.48,1827.74 cw(c2810.41,1827.74) 2818.95,1819.21 cw(c2827.48,1810.67) v1@2827.48,1822.74
  Mid-Layer 1 w5: v1(2827.48,1827.74) 2848.74,1849 3741,1849 4265.62,1324.38 v1(4536.38,1324.38) ; v1@2827.48,1835.24 ccw(c2827.48,1853.35) 2840.28,1840.54 ccw(c2853.09,1827.74) v1@2834.98,1827.74 ; v1@4531.07,1319.07 ccw(c4518.27,1306.27) 4518.27,1324.38 ccw(c4518.27,1342.48) v1@4531.07,1329.68
E8: RN9.1 U3.E8 | length 2191.5
  Top Layer w5: v1(4538,1158) RN9.1@4572,1158 ; v1@4543.3,1152.7 cw(c4556.11,1139.89) 4556.11,1158 cw(c4556.11,1176.11) v1@4543.3,1163.3 ; v1@4544.46,1161.81 ccw(c4549.19,1164.6) 4550.62,1159.29 ccw(c4553.09,1150.07) v1@4544.64,1154.51 ; v1@4545.8,1158 ccw(c4545.8,1174.39) RN9.1@4557.39,1162.8 ; 4550.63,1158 cw(c4550.63,1148.44) RN9.1@4557.39,1155.2
  Top Layer w10: U3.E8@2807.8,1768.68 v1(2827.48,1788.37) ; U3.E8@2807.8,1773.53 ccw(c2807.8,1785.22) 2816.06,1776.95 ccw(c2824.33,1768.68) U3.E8@2812.64,1768.68 ; v1@2822.48,1788.37 cw(c2810.41,1788.37) 2818.95,1779.84 cw(c2827.48,1771.3) v1@2827.48,1783.37
  Mid-Layer 1 w5: v1@2827.48,1780.87 cw(c2827.48,1762.76) 2840.28,1775.57 cw(c2853.09,1788.37) v1@2834.98,1788.37 ; v1(2827.48,1788.37) 2860.85,1755 3534,1755 4131,1158 v1(4538,1158) ; v1@4532.7,1152.7 ccw(c4519.89,1139.89) 4519.89,1158 ccw(c4519.89,1176.11) v1@4532.7,1163.3
E9: RN9.2 U3.E9 | length 2182.8
  Top Layer w5: v1(4536,1128) RN9.2@4572.5,1128 ; v1@4541.3,1122.7 cw(c4554.11,1109.89) 4554.11,1128 cw(c4554.11,1146.11) v1@4541.3,1133.3 ; 4547.02,1128 cw(c4547.02,1113.33) RN9.2@4557.39,1123.7 ; 4549.41,1128 ccw(c4549.41,1139.28) RN9.2@4557.39,1131.3
  Top Layer w10: U3.E9@2807.8,1724.47 cw(c2807.8,1712.78) 2816.06,1721.05 cw(c2824.33,1729.32) U3.E9@2812.64,1729.32 ; U3.E9@2807.8,1729.32 v1(2827.48,1709.63) ; v1@2822.48,1709.63 ccw(c2810.41,1709.63) 2818.95,1718.16 ccw(c2827.48,1726.7) v1@2827.48,1714.63
  Mid-Layer 1 w5: v1(2827.48,1709.63) 2858.85,1741 3514,1741 4127,1128 v1(4536,1128) ; v1@2827.48,1717.13 ccw(c2827.48,1735.24) 2840.28,1722.43 ccw(c2853.09,1709.63) v1@2834.98,1709.63 ; v1@4530.7,1122.7 ccw(c4517.89,1109.89) 4517.89,1128 ccw(c4517.89,1146.11) v1@4530.7,1133.3
F1: J5.3 U3.F1 | length 1523.3
  Top Layer w5: U3.F1@2763.23,2049.47 ccw(c2750.7,2062) 2768.43,2062 ccw(c2786.15,2062) U3.F1@2773.62,2049.47 ; U3.F1@2768.43,2044.28 2768.43,2186.43 3104,2522 3104,2931 3153,2980 3153,3059.17 J5.3@3203,3109.17 ; J5.3@3175.97,3109.17 cw(c3110.72,3109.17) 3156.86,3063.03 cw(c3203,3016.9) J5.3@3203,3082.15 ; J5.3@3180.97,3109.17 cw(c3127.79,3109.17) 3165.4,3071.57 cw(c3203,3033.97) J5.3@3203,3087.15 ; J5.3@3185.97,3109.17 cw(c3144.86,3109.17) 3173.93,3080.11 cw(c3203,3051.04) J5.3@3203,3092.15
F2: J5.6 U3.F2 | length 1247
  Top Layer w5: U3.F2@2761.08,2004.91 ccw(c2743.36,2004.91) 2755.89,2017.44 ccw(c2768.43,2029.97) U3.F2@2768.43,2012.25 ; U3.F2@2768.43,2004.91 2749,2024.33 2749,2222 3076,2549 3076,2982.17 J5.6@3103,3009.17 ; J5.6@3078.62,2997.5 cw(c3066.49,2991.69) 3076,2982.17 cw(c3085.52,2972.66) J5.6@3091.33,2984.8 ; J5.6@3083.13,2999.66 cw(c3073.24,2994.92) 3081,2987.17 cw(c3088.75,2979.41) J5.6@3093.49,2989.31
F3: J5.4 U3.F3 | length 1732
  Top Layer w5: U3.F3@2768.43,1965.54 2788,1985.11 2788,2158 3136,2506 3136,2918 3203,2985 J5.4@3203,3009.17 ; U3.F3@2768.43,1972.88 ccw(c2768.43,1990.6) 2780.96,1978.07 ccw(c2793.49,1965.54) U3.F3@2775.77,1965.54 ; 3139.77,2921.77 ccw(c3052.36,3009.17) J5.4@3175.97,3009.17 ; 3148.3,2930.3 ccw(c3069.43,3009.17) J5.4@3180.97,3009.17 ; 3156.84,2938.84 ccw(c3086.51,3009.17) J5.4@3185.97,3009.17 ; 3165.37,2947.37 ccw(c3103.58,3009.17) J5.4@3190.97,3009.17 ; 3173.91,2955.91 ccw(c3120.65,3009.17) J5.4@3195.97,3009.17 ; 3182.45,2964.45 ccw(c3137.72,3009.17) J5.4@3200.97,3009.17 ; 3190.98,2972.98 ccw(c3154.79,3009.17) J5.4@3205.97,3009.17
F8: RN8.2 U3.F8 | length 2261
  Top Layer w5: U3.F8@2768.43,1768.68 v1(2787.74,1788) ; U3.F8@2768.43,1776.03 ccw(c2768.43,1793.75) 2780.96,1781.22 ccw(c2793.49,1768.68) U3.F8@2775.77,1768.68 ; U3.F8@2771.77,1775.92 ccw(c2763.14,1790.87) v1@2780.29,1788.87 ; U3.F8@2775.66,1772.03 cw(c2790.61,1763.4) v1@2788.61,1780.55 ; 2778.49,1779.79 cw(c2783.31,1771.45) v1@2785.8,1780.76 ; 2779.53,1778.75 ccw(c2771.19,1783.57) v1@2780.5,1786.06 ; v1@2780.24,1788 cw(c2762.13,1788) 2774.94,1775.2 cw(c2787.74,1762.39) v1@2787.74,1780.5 ; 2780.39,1780.89 ccw(c2775.46,1789.43) v1@2785.26,1788.29 ; 2780.63,1780.65 cw(c2789.17,1775.72) v1@2788.03,1785.52 ; v1(4535.88,1292.88) RN8.2@4573,1292.88 ; v1@4541.18,1287.58 cw(c4553.99,1274.77) 4553.99,1292.88 cw(c4553.99,1310.99) v1@4541.18,1298.18 ; RN8.2@4557.39,1289.08 ccw(c4548.22,1279.9) 4548.22,1292.88 ccw(c4548.22,1305.85) RN8.2@4557.39,1296.68
  Mid-Layer 1 w5: v1(2787.74,1788) 2806.74,1807 3581,1807 4095.12,1292.88 v1(4535.88,1292.88) ; v1@2787.74,1795.5 ccw(c2787.74,1813.61) 2800.54,1800.8 ccw(c2813.35,1788) v1@2795.24,1788 ; v1@4530.58,1287.58 ccw(c4517.77,1274.77) 4517.77,1292.88 ccw(c4517.77,1310.99) v1@4530.58,1298.18
G1: J5.5 U3.G1 | length 1498.2
  Top Layer w5: U3.G1@2723.86,2049.47 ccw(c2711.33,2062) 2729.06,2062 ccw(c2746.78,2062) U3.G1@2734.25,2049.47 ; U3.G1@2729.06,2044.28 2729.06,2238.06 3050,2559 3050,3056.17 J5.5@3103,3109.17 ; J5.5@3075.97,3109.17 cw(c3010.72,3109.17) 3056.86,3063.03 cw(c3103,3016.9) J5.5@3103,3082.15 ; J5.5@3080.97,3109.17 cw(c3027.79,3109.17) 3065.4,3071.57 cw(c3103,3033.97) J5.5@3103,3087.15 ; J5.5@3085.97,3109.17 cw(c3044.86,3109.17) 3073.93,3080.11 cw(c3103,3051.04) J5.5@3103,3092.15
G2: J5.8 U3.G2 | length 1412
  Top Layer w5: U3.G2@2721.71,2004.91 ccw(c2703.99,2004.91) 2716.52,2017.44 ccw(c2729.06,2029.97) U3.G2@2729.06,2012.25 ; U3.G2@2729.06,2004.91 2710,2023.96 2710,2253 3003,2546 J5.8@3003,3009.17 ; J5.8@2983.89,2990.06 cw(c2937.75,2943.92) 3003,2943.92 cw(c3068.25,2943.92) J5.8@3022.11,2990.06 ; J5.8@2987.42,2993.6 cw(c2949.82,2955.99) 3003,2955.99 cw(c3056.18,2955.99) J5.8@3018.58,2993.6 ; J5.8@2990.96,2997.13 cw(c2961.89,2968.07) 3003,2968.07 cw(c3044.11,2968.07) J5.8@3015.04,2997.13